# Altium PCB ES_Class6C_2L.PcbDoc
Units mm, origin at the board's own origin, x right, y up, seen from the top; angles counter-clockwise.
Board outline 100 x 100 mm, 2 copper layers (Top Layer, Bottom Layer), stack 1.586 mm thick; 72 components, 53 nets, 261 pads, 0 vias.
Unrouted connection lines stored in the file: 165.
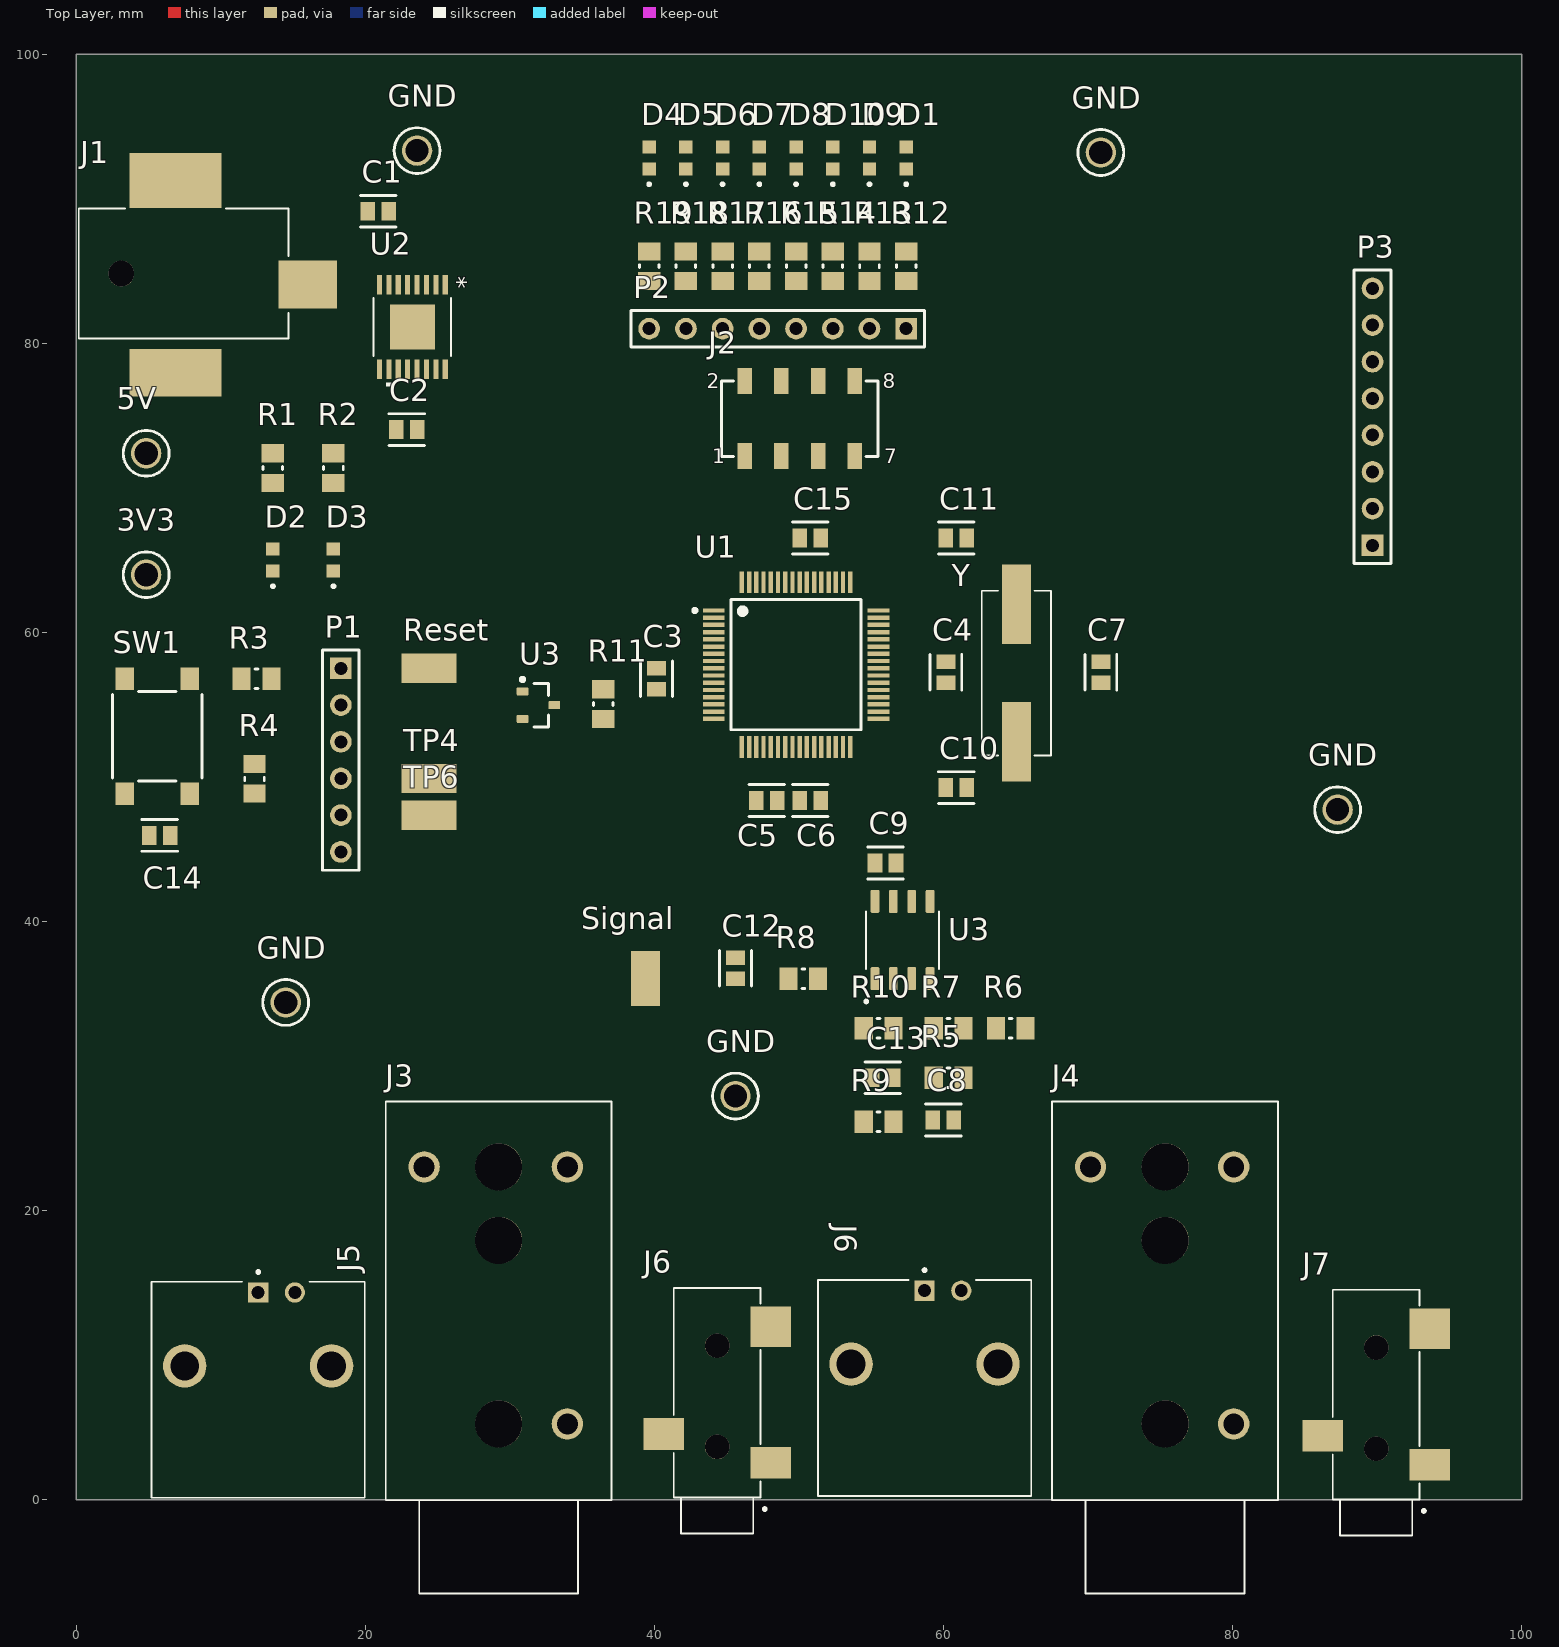
[diagram p0: Top Layer view]
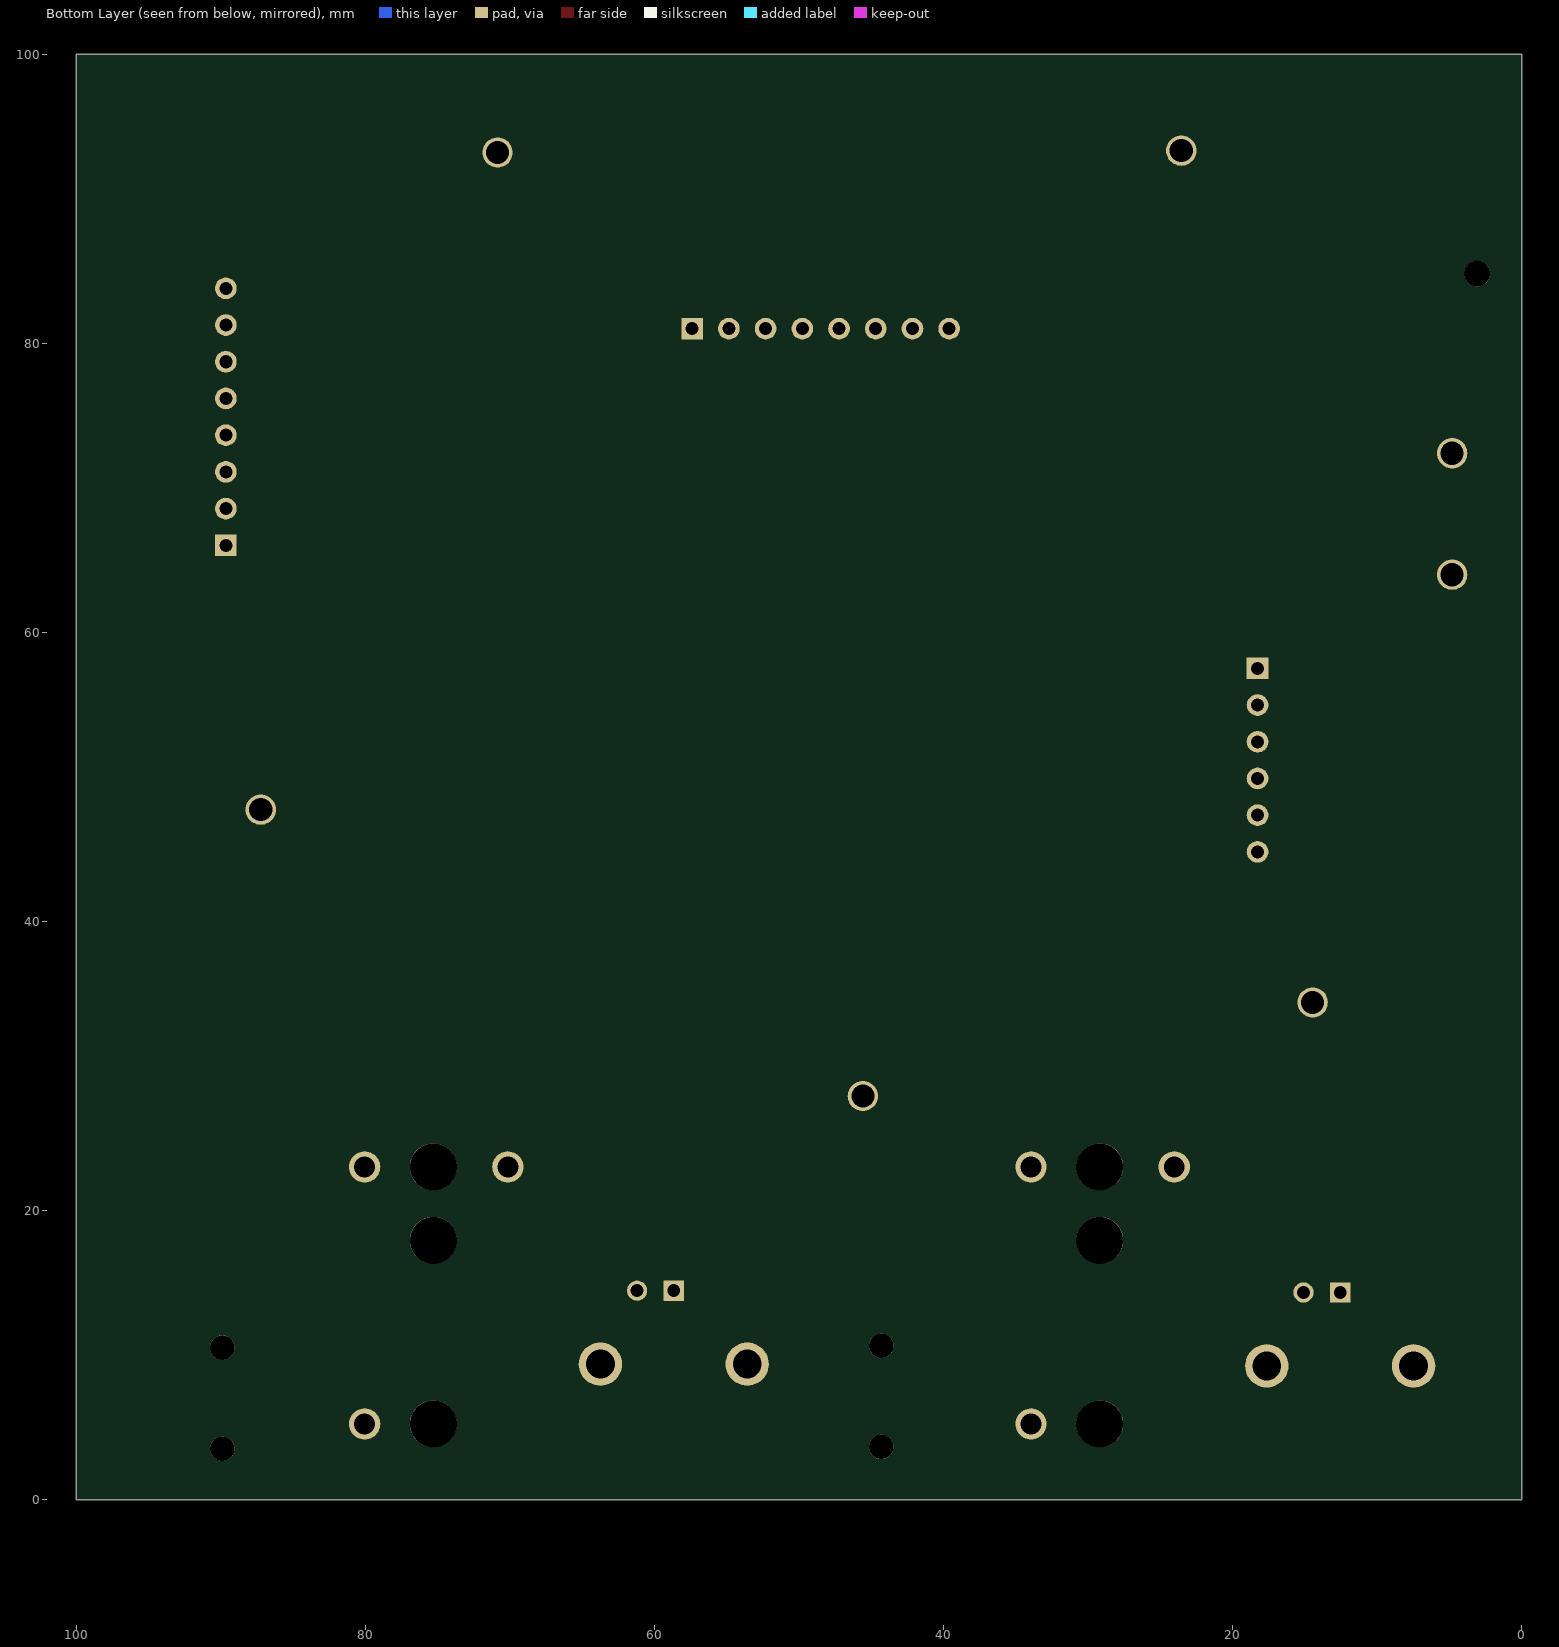
[diagram p1: Bottom Layer view, seen from below]

## Layer stack, top to bottom
Top Solder: solder mask 0.0102, Solder Resist, Dk 3.5
Top Layer: signal copper 0.018
Dielectric1: core 1.55, FR-4, Dk 4.8
Bottom Layer: signal copper 0.018
Bottom Solder: solder mask 0.0102, Solder Resist, Dk 3.5

## Board outline
0,0 100,0 100,100 0,100

## Design rules (kind name [scope] priority, off if disabled: settings)
BoardOutlineClearance [All] p1: gap=0.25 ignorepadtopadclearanceinfootprint=FALSE except(0: Arc-SplitContinuation Track-SplitContinuation SMDPad-SplitContinuation THPad-SplitContinuation Via-SplitContinuation Fill-SplitContinuation Poly-SplitContinuation Region-SplitContinuation Text-SplitContinuation)
Clearance Clearance-xPP-xTP-xTT [All] p1: gap=0.151 ignorepadtopadclearanceinfootprint=FALSE
ComponentClearance [All] p1: gap=0.25 collisioncheckmode=3 verticalgap=0.25 showdistances=FALSE
DiffPairsRouting [All] p1: maxlimit=0.25 minlimit=0.25 mostfreqgap=0.25 toplayer_minwidth=0.381 toplayer_maxwidth=0.381 toplayer_prefwidth=0.381 bottomlayer_minwidth=0.381 bottomlayer_maxwidth=0.381 bottomlayer_prefwidth=0.381 maxuncoupledlength=12.5
Height [All] p1: minheight=0 maxheight=25 prefheight=12.5
HoleSize HoleSize-PTH [All] p1: absolutevalues=TRUE maxlimit=10 minlimit=0.25 maxpercent=80.000 minpercent=20.000
HoleToHoleClearance [All] p1: gap=0.35 allowstackedmicrovias=TRUE
MinimumAnnularRing "Minimum IAR  >0.45mm" [((ObjectKind = 'Pad') OR (ObjectKind = 'Via')) And (Layer = 'MultiLayer') And (HoleDiameter > AsMM(0.45))] p1: minimumring=0.175 // minimum inner annular ring for pads > 0.45mm finished hole size
MinimumAnnularRing "Minimum IAR <=0.45mm" [((ObjectKind = 'Pad') OR (ObjectKind = 'Via')) And (Layer = 'MultiLayer') And (HoleDiameter <= AsMM(0.45))] p2: minimumring=0.175 // minimum inner annular ring for pads <= 0.45mm finished hole size
MinimumSolderMaskSliver [All] p1: minsoldermaskwidth=0.08
PasteMaskExpansion [All] p1: expansion=-0.025
PlaneClearance PlaneClearance-IPI [All] p1: clearance=0.25
PlaneConnect [All] p1: planeconnectstyle=Relief reliefexpansion=0.175 reliefentries=4 reliefconductorwidth=0.2 reliefairgap=0.2
PolygonConnect PolygonConnect-xTW [All] p1: connectstyle=Relief reliefconductorwidth=0.2 reliefentries=4 polygonreliefangle="90 Angle" airgapwidth=0.2
RoutingCorners [All] p1: cornerstyle=45-Degree minsetback=2.5 maxsetback=2.5
RoutingVias RoutingViasES [All] p1: holewidth=0.3 width=0.65 viastyle="Through Hole" minholewidth=0.25 minwidth=0.61 maxholewidth=0.45 maxwidth=0.8 // finishet hole size <= 0.45mm
SilkToSilkClearance [All] p1: silktosilkclearance=0.2
SilkToSolderMaskClearance SilkscreenOverComponentPads [IsPad] p1: minsilkscreentomaskgap=0.2 clearancetoexposedcopper=TRUE
SolderMaskExpansion [All] p1: expansion=0 istentingtop=FALSE
UnRoutedNet [All] p1: checkbadconnections=TRUE
Width Width-xTW [All] p1: maxlimit=1.5 minlimit=0.15 preferedwidth=0.2
17 further rules are at their usual default settings.

## Classes and differential pairs
component class 2225_VumetreFrequencemetre: 3V3 5V C1 C2 C3 C4 C5 C6 C7 C8 C9 C10 C11 C12 C13 C14 C15 D1 D2 D3 D4 D5 D6 D7 D8 D9 D10 GND J1 J2 J3 J4 J5 J6 J7 P1 P2 P3 R1 R2 R3 R4 R5 R6 R7 R8 R9 R10 R11 R12 R13 R14 R15 R16 R17 R18 R19 Reset Signal SW1 TP4 TP6 U1 U2 U3 Y

## Components (designator, comment, footprint, x,y, rotation, side; value= is the part's Value field where it differs from the comment)
3V3 "5010" KSTN-5010_V 4.826,64.008 r0 top
5V "5010" KSTN-5010_V 4.826,72.408 r0 top
C1 "10u" FP-GRM21B-0_15-IPC_C 20.89,89.154 r180 top
C2 "10u" FP-GRM21B-0_15-IPC_C 22.84,74.041 r180 top
C3 "100n" FP-GRM21B-0_15-IPC_C 40.132,56.811 r90 top
C4 "100n" FP-GRM21B-0_15-IPC_C 60.143,57.261 r90 top
C5 "100n" FP-GRM21B-0_15-IPC_C 47.76,48.387 r0 top
C6 "100n" FP-GRM21B-0_15-IPC_C 50.76,48.387 r180 top
C7 "100n" FP-GRM21B-0_15-IPC_C 70.866,57.261 r90 top
C8 "100n" FP-GRM21B-0_15-IPC_C 59.98,26.289 r180 top
C9 "100n" FP-GRM21B-0_15-IPC_C 55.971,44.069 r0 top
C10 "22p" FP-GRM21B-0_15-IPC_C 60.869,49.276 r180 top
C11 "22p" FP-GRM21B-0_15-IPC_C 60.869,66.548 r180 top
C12 "10n" FP-GRM21B-0_15-IPC_C 45.593,36.791 r90 top
C13 "220n" FP-GRM21B-0_15-IPC_C 55.789,29.21 r180 top
C14 "10n" FP-GRM21B-0_15-IPC_C 5.751,45.974 r180 top
C15 "10u" FP-GRM21B-0_15-IPC_C 50.764,66.548 r0 top
D1 "LTST-C191KFKT" LEDC1608X55N 57.404,92.835 r90 top
D2 "LTST-C191KFKT" LEDC1608X55N 13.589,65.026 r90 top
D3 "LTST-C191KFKT" LEDC1608X55N 17.78,65.026 r90 top
D4 "LTST-C191KFKT" LEDC1608X55N 39.624,92.835 r90 top
D5 "LTST-C191KFKT" LEDC1608X55N 42.164,92.835 r90 top
D6 "LTST-C191KFKT" LEDC1608X55N 44.704,92.835 r90 top
D7 "LTST-C191KFKT" LEDC1608X55N 47.244,92.835 r90 top
D8 "LTST-C191KFKT" LEDC1608X55N 49.784,92.835 r90 top
D9 "LTST-C191KFKT" LEDC1608X55N 54.864,92.835 r90 top
D10 "LTST-C191KFKT" LEDC1608X55N 52.324,92.835 r90 top
GND "5011" KSTN-5011_V 14.478,34.417 r0 top
GND "5011" KSTN-5011_V 87.249,47.752 r0 top
GND "5011" KSTN-5011_V 70.866,93.218 r0 top
GND "5011" KSTN-5011_V 23.566,93.345 r0 top
GND "5011" KSTN-5011_V 45.593,27.94 r0 top
J1 "RASM722PTR13X" SWITCHCRAFT_RASM722PTR13X 6.862,84.838 r270 top
J2 "61030821821" 61030821821 50.034,74.803 r0 top
J3 "SN37A12A" SWITCHCRAFT_SN37A12A 29.21,10.541 r270 top
J4 "SN37A12A" SWITCHCRAFT_SN37A12A 75.311,10.541 r270 top
J5 "CONBNC002" LINX_CONBNC002 12.573,9.271 r0 top
J6 "SJ-3523-SMT" CUI_SJ-3523-SMT 44.323,3.668 r90 top
J6 "CONBNC002" LINX_CONBNC002 58.674,9.398 r0 top
J7 "SJ-3523-SMT" CUI_SJ-3523-SMT 89.916,3.541 r90 top
P1 "Header 6" HDR1X6 18.288,57.531 r270 top
P2 "Header 8" HDR1X8 57.404,81.026 r180 top
P3 "Header 8" HDR1X8 89.662,66.04 r90 top
R1 "300" RESC2013X50X30ML20T20 13.589,71.383 r270 top
R2 "100" RESC2013X50X30ML20T20 17.78,71.383 r270 top
R3 "10k" RESC2013X50X30ML20T20 12.455,56.807 r180 top
R4 "1k" RESC2013X50X30ML20T20 12.319,49.882 r90 top
R5 "100k" RESC2013X50X30ML20T20 60.334,29.21 r0 top
R6 "100k" RESC2013X50X30ML20T20 64.634,32.639 r180 top
R7 "33k" RESC2013X50X30ML20T20 60.334,32.639 r180 top
R8 "750" RESC2013X50X30ML20T20 50.283,36.065 r180 top
R9 "200k" RESC2013X50X30ML20T20 55.49,26.162 r0 top
R10 "33k" RESC2013X50X30ML20T20 55.49,32.639 r180 top
R11 "10k" RESC2013X50X30ML20T20 36.449,55.06 r270 top
R12 "100" RESC2013X50X30ML20T20 57.404,85.353 r270 top
R13 "100" RESC2013X50X30ML20T20 54.864,85.353 r270 top
R14 "100" RESC2013X50X30ML20T20 52.324,85.353 r270 top
R15 "100" RESC2013X50X30ML20T20 49.784,85.353 r270 top
R16 "100" RESC2013X50X30ML20T20 47.244,85.353 r270 top
R17 "100" RESC2013X50X30ML20T20 44.704,85.353 r270 top
R18 "100" RESC2013X50X30ML20T20 42.164,85.353 r270 top
R19 "100" RESC2013X50X30ML20T20 39.624,85.353 r270 top
Reset "5019" KSTN-5019_V 24.384,57.531 r180 top
Signal "5019" KSTN-5019_V 39.37,36.065 r90 top
SW1 "430182043816" WS-TASV_L6W6H4.3_4301x20438x6 5.588,52.832 r270 top
TP4 "5019" KSTN-5019_V 24.384,49.911 r180 top
TP6 "5019" KSTN-5019_V 24.384,47.371 r180 top
U1 "IC_Microchip_PIC32MX470F512H-120-PT_eec" Microchip_C04-085B_0 49.784,57.785 r0 top
U2 "MAX1793EUE33+" 21-0108_U16E+3_MXM 23.241,81.153 r270 top
U3 "TL431IDBZR" DBZ0003A_L 31.961,54.985 r0 top
U3 "MCP6002-E/SN" SOIC127P599X175-8N 57.15,38.735 r90 top
Y "ECS-100-18-5PX-TR" XTAL_ECS-100-18-5PX-TR 65.024,57.201 r90 top

## Footprints (in the part's own frame and the unit in brackets; to place one, negate y for a bottom-side part, rotate by r counter-clockwise, add the part's x,y. Pads: shape width x height; smd on the part's side, far side on the other; paste and mask are expansions set on the pad)
21-0108_U16E+3_MXM [mm]
  rect 1.353x0.355 smd paste+0 mask+0: 1(-2.925,2.275) 2(-2.925,1.625) 3(-2.925,0.975) 4(-2.925,0.325) 5(-2.925,-0.325) 6(-2.925,-0.975) 7(-2.925,-1.625) 8(-2.925,-2.275) 9(2.925,-2.275) 10(2.925,-1.625) 11(2.925,-0.975) 12(2.925,-0.325) 13(2.925,0.325) 14(2.925,0.975) 15(2.925,1.625) 16(2.925,2.275)
  rect 3.099x3.099 smd paste-1.537 mask+0: EPAD(0,0)
  silkscreen extent -2,-2.68 4.11,2.68, body extent -3.25,-2.55 3.25,2.55, height 1.09
61030821821 [mm] "Socket Header, Pitch 2.54 mm, SMT, Vertical, dual row, 8p"
  rect 1x1.8 smd: 1(-3.81,-2.6) 2(-3.81,2.6) 3(-1.27,-2.6) 4(-1.27,2.6) 5(1.27,-2.6) 6(1.27,2.6) 7(3.81,-2.6) 8(3.81,2.6)
  silkscreen extent -5.41,-2.62 5.41,2.62, body extent -5.08,-3.35 5.08,3.35, height 8.52
CUI_SJ-3523-SMT [mm]
  rect 2.2x2.8 smd: 1(-1.1,-3.7) 3(0.9,3.7)
  rect 2.8x2.8 smd: 2(8.3,-3.7)
  round 1.7 hole 1.7 unplated: ""(0,0) ""(7,0)
  silkscreen extent -6,-3.4 11,3
DBZ0003A_L [mm] "SOT23, 3-Leads, Body 3.04x1.4mm, Pitch 0.95mm, IPC High Density"
  rrect18% 0.8x0.55 smd: 1(-1.1,0.95) 2(-1.1,-0.95) 3(1.1,0)
  silkscreen extent -1.22,-1.5 0.7,1.9, body extent -1.26,-1.46 1.26,1.46, height 0.96
FP-GRM21B-0_15-IPC_C [mm]
  rect 1.006x1.308 smd paste+0 mask+0: 1(-0.726,0) 2(0.726,0)
  silkscreen extent -1.23,-1.1 1.23,1.1, body extent -1.33,-0.8 1.33,0.8, height 0.25
HDR1X6 [mm] "Connector; Header; 6 Position"
  rect 1.5x1.5 hole 0.9: 1(0,0)
  round 1.5 hole 0.9: 2(2.54,0) 3(5.08,0) 4(7.62,0) 5(10.16,0) 6(12.7,0)
  silkscreen extent -1.27,-1.27 13.97,1.27
HDR1X8 [mm] "Connector; Header; 8 Position"
  rect 1.5x1.5 hole 0.9: 1(0,0)
  round 1.5 hole 0.9: 2(2.54,0) 3(5.08,0) 4(7.62,0) 5(10.16,0) 6(12.7,0) 7(15.24,0) 8(17.78,0)
  silkscreen extent -1.27,-1.27 19.05,1.27
KSTN-5010_V [mm] "Test Point, Dia 3.17mm"
  round 2.1 hole 1.6: 1(0,0)
  silkscreen extent -1.59,-1.58 1.59,1.58, body extent -1.59,-1.59 1.59,1.59, height 8.13
KSTN-5011_V [mm] "Test Point, Dia 3.17mm"
  round 2.1 hole 1.6: 1(0,0)
  silkscreen extent -1.59,-1.58 1.59,1.58, body extent -1.59,-1.59 1.59,1.59, height 8.13
KSTN-5019_V [mm] "Test Point, 1-Leads, Body 3.81x2.03mm"
  rect 3.8x2.03 smd: 1(0,0)
  body extent -1.9,-1.01 1.9,1.02, height 2.29
LEDC1608X55N [mm]
  rect 0.91x0.93 smd: A(0.76,0) C(-0.76,0)
  silkscreen extent -1.91,-0.1 -1.72,0.1, body extent -0.4,-0.8 0.4,0.8, height 0.8
LINX_CONBNC002 [mm]
  rect 1.398x1.398 / inner round 1.398 / far side rect 1.398x1.398 hole 0.89: 1(0,5.08)
  round 1.398 hole 0.89: 2(2.54,5.08)
  round 3 hole 2: S1(-5.08,0) S2(5.08,0)
  silkscreen extent -7.37,-9.12 7.37,6.6, body extent -7.95,-29.38 7.95,5.82, height 14.89
Microchip_C04-085B_0 [mm]
  rect 1.5x0.3 smd paste+0 mask+0: 1(-5.7,3.75) 2(-5.7,3.25) 3(-5.7,2.75) 4(-5.7,2.25) 5(-5.7,1.75) 6(-5.7,1.25) 7(-5.7,0.75) 8(-5.7,0.25) 9(-5.7,-0.25) 10(-5.7,-0.75) 11(-5.7,-1.25) 12(-5.7,-1.75) 13(-5.7,-2.25) 14(-5.7,-2.75) 15(-5.7,-3.25) 16(-5.7,-3.75) 33(5.7,-3.75) 34(5.7,-3.25) 35(5.7,-2.75) 36(5.7,-2.25) 37(5.7,-1.75) 38(5.7,-1.25) 39(5.7,-0.75) 40(5.7,-0.25) 41(5.7,0.25) 42(5.7,0.75) 43(5.7,1.25) 44(5.7,1.75) 45(5.7,2.25) 46(5.7,2.75) 47(5.7,3.25) 48(5.7,3.75)
  rect 0.3x1.5 smd paste+0 mask+0: 17(-3.75,-5.7) 18(-3.25,-5.7) 19(-2.75,-5.7) 20(-2.25,-5.7) 21(-1.75,-5.7) 22(-1.25,-5.7) 23(-0.75,-5.7) 24(-0.25,-5.7) 25(0.25,-5.7) 26(0.75,-5.7) 27(1.25,-5.7) 28(1.75,-5.7) 29(2.25,-5.7) 30(2.75,-5.7) 31(3.25,-5.7) 32(3.75,-5.7) 49(3.75,5.7) 50(3.25,5.7) 51(2.75,5.7) 52(2.25,5.7) 53(1.75,5.7) 54(1.25,5.7) 55(0.75,5.7) 56(0.25,5.7) 57(-0.25,5.7) 58(-0.75,5.7) 59(-1.25,5.7) 60(-1.75,5.7) 61(-2.25,5.7) 62(-2.75,5.7) 63(-3.25,5.7) 64(-3.75,5.7)
  silkscreen extent -7.12,-4.5 4.5,4.5, body extent -6.55,-6.55 6.55,6.55, height 0.25
RESC2013X50X30ML20T20 [mm] "Chip Resistor, 2-Leads, Body 2.00x1.25mm, IPC Low Density"
  rect 1.25x1.55 smd: 1(-1.025,0) 2(1.025,0)
  silkscreen extent -0.1,-0.67 0.1,0.67, body extent -1.1,-0.72 1.1,0.72, height 0.5
SOIC127P599X175-8N [mm]
  rrect25% 1.58x0.6 smd: 1(-2.67,1.905) 2(-2.67,0.635) 3(-2.67,-0.635) 4(-2.67,-1.905) 5(2.67,-1.905) 6(2.67,-0.635) 7(2.67,0.635) 8(2.67,1.905)
  silkscreen extent -4.35,-2.52 1.99,2.6
SWITCHCRAFT_RASM722PTR13X [mm]
  rect 3.3x4.06 smd: 1(0.76,9.14)
  rect 3.81x6.35 smd: 2(-6.43,0)
  rect 3.3x6.35 smd: 3(6.86,0)
  round 1.78 hole 1.78 unplated mask+0.254: ""(0,-3.76)
  silkscreen extent -4.5,-6.7 4.5,7.8, body extent -7.47,-6.6 7.77,10.41, height 11.02
SWITCHCRAFT_SN37A12A [mil]
  round 85.5 hole 57: S(208,187) T(-492,187) TB(-492,-203)
  round 128 hole 128 unplated: ""(-492,0) ""(-292,0) ""(208,0)
  silkscreen extent -670,-308 670,308
WS-TASV_L6W6H4.3_4301x20438x6 [mm] "SMD Tact Switch, body 6x6mm"
  rect 1.55x1.3 smd: A1(-3.975,2.25) A2(3.975,2.25) B1(-3.975,-2.25) B2(3.975,-2.25)
  silkscreen extent -3.1,-3.1 3.1,3.1, body extent -4.5,-3.1 4.5,3.1, height 4.3
XTAL_ECS-100-18-5PX-TR [mm]
  rect 5.5x2 smd: 1(-4.75,0) 2(4.75,0)
  silkscreen extent -5.7,-2.4 5.7,2.4

## Part data
3V3 5V: library part CMP-1672-00002-4, "Test Point, Red, Through Hole, RoHS, Bulk", Colour=Red, Manufacturer=Keystone, Package Quantity=100, ComponentLink1Description="Manufacturer URL", ComponentLink1URL=http://www.keyelco.com/, ComponentLink2Description=Datasheet, ComponentLink2URL=http://www.keyelco.com/product-pdf.cfm?p=1319, Contact Material=Bronze, Contact Plating=Silver, DatasheetVersion="Rev. F, 12/2013", Height="8.12 mm", Mount="Through Hole", Mounting Technology="Through Hole", PackageDescription="1-Pin Through Hole Device, Dia 3.17 mm", PackageReference=5010, Packaging=Bulk, Pins=1, REACH SVHC="No SVHC", RoHSCompliant=true
C1 C2 C3 C4 C5 C6 C7 C8 C9 C10 C11 C12 C13 C14 C15: library part CMP-2007-03541-2, "Chip Multilayer Ceramic Capacitors for General Purpose, 0805, 10uF, X5R, 15%, 10%, 25V", Capacitance=10uF, Case Code (Imperial)=0805, Case Code (Metric)=2012, Dielectric=X5R, Max Operating Temperature=85°C, Min Operating Temperature=-55°C, Package Quantity=1, Tolerance=10%, Voltage=25V, Case/Package=0805, Depth=1.25mm, Height=1.25mm, Lead Free="Lead Free", Length=2mm, Material=Ceramic, Mount="Surface Mount", Packaging="Tape and Reel", Radiation Hardening=No, Termination=SMD/SMT, Thickness=0.053inch, Voltage Rating=25V, Voltage Rating (DC)=25V, Width=0.049inch
D1 D2 D3 D4 D5 D6 D7 D8 D9 D10: "Orange 605nm LED Indication - Discrete 2V 0603 (1608 Metric)", Package="0603 Lite-On", Availability="In Stock", Check_prices=https://www.snapeda.com/parts/LTST-C191KFKT/Lite-On+Inc./view-part/?ref=eda, MF="Lite-On Inc.", MP=LTST-C191KFKT, Price=None, Purchase-URL=https://pricing.snapeda.com/search/part/LTST-C191KFKT/?ref=eda, SnapEDA_Link=https://www.snapeda.com/parts/LTST-C191KFKT/Lite-On+Inc./view-part/?ref=snap
GND GND GND GND GND: library part CMP-1672-00003-4, "Test Point, Black, Through Hole, RoHS, Bulk", Colour=Black, Manufacturer=Keystone, Package Quantity=100, ComponentLink1Description="Manufacturer URL", ComponentLink1URL=http://www.keyelco.com/, ComponentLink2Description=Datasheet, ComponentLink2URL=http://www.keyelco.com/product-pdf.cfm?p=1320, Contact Material=Bronze, Contact Plating=Silver, DatasheetVersion="Rev. F, 12/2013", Height="8.12 mm", Mount="Through Hole", Mounting Technology="Through Hole", PackageDescription="1-Pin Through Hole Device, Dia 3.17 mm", PackageReference=5011, Packaging=Bulk, Pins=1, REACH SVHC="No SVHC", RoHSCompliant=true
J1: "Power Barrel Connector Jack 2.10mm ID (0.083), 5.50mm OD (0.217) Surface Mount, Right Angle", Package=None, Supplier Part Number 1=SC2028-1-ND, Availability="In Stock", Check_prices=https://www.snapeda.com/parts/RASM722PTR13X/Switchcraft+%252F+Conxall/view-part/?ref=eda, MF=Switchcraft, MP=RASM722PTR13X, Price=None, Purchase-URL=https://pricing.snapeda.com/search/part/RASM722PTR13X/?ref=eda, SnapEDA_Link=https://www.snapeda.com/parts/RASM722PTR13X/Switchcraft+%252F+Conxall/view-part/?ref=snap, Supplier 1=Digi-Key
J2: "WR-PHD Socket Header, SMT, Vertical, pitch 2.54mm, 2 Row, 8P", Contact Resistance=20mΩ, Manufacturer="Wurth Elektronik", Operating Temperature Max=105°C, Operating Temperature Min=-40°C, Rated Current=3A, Supplier Part Number 1=732-13381-1-ND, Withstanding Voltage=600V, Working Voltage=250V, Category="Board-to-Board Connectors", ComponentLink1Description="Website Link", ComponentLink1URL=https://www.we-online.com/redexpert/article/61030821821?ad, ComponentLink2Description="Datasheet Link", ComponentLink2URL=https://www.we-online.com/redexpert/spec/61030821821?ad, Gender="Socket Header", Manufacturer Part Number=61030821821, Match Code=WR-PHD, Mount="Surface Mount", Number of Pins=8, Number of Rows=2, Orientation=Vertical, Packaging="Tape and Reel", Pitch=2.54mm, Supplier 1=Digi-Key
J3 J4: Package=None, Supplier Part Number 1=SC2014-ND, Availability=Unavailable, MP=SN37A12A, Price=None, Supplier 1=Digi-Key
J5 J6: "BNC Connector Jack, Female Socket 50Ohm Panel Mount, Through Hole, Right Angle Solder", Package=None, Supplier Part Number 1=343-CONBNC002-ND, Availability="In Stock", Check_prices=https://www.snapeda.com/parts/CONBNC002/Linx/view-part/?ref=eda, MF="Linx Technologies Inc.", MP=CONBNC002, Price=None, Purchase-URL=https://pricing.snapeda.com/search/part/CONBNC002/?ref=eda, SnapEDA_Link=https://www.snapeda.com/parts/CONBNC002/Linx/view-part/?ref=snap, Supplier 1=Digi-Key
J6 J7: "3.50mm _0.141, 1/8, Mini Plug_ - Headphone Phone Jack Stereo _3 Conductor, TRS_ Connector Solder", Package=None, Supplier Part Number 1=CP-3523SJCT-ND, Availability=Unavailable, MF="CUI Devices", MP=SJ-3523-SMT, Price=None, SnapEDA_Link=https://www.snapeda.com/parts/SJ-3523-SMT/CUI%20Devices/view-part/278287/?ref=snap, Supplier 1=Digi-Key
P1: "Header, 6-Pin", LatestRevisionDate=17-Jul-2002, LatestRevisionNote="Re-released for DXP Platform.", Publisher="Altium Limited"
P2 P3: "Header, 8-Pin", LatestRevisionDate=17-Jul-2002, LatestRevisionNote="Re-released for DXP Platform.", Publisher="Altium Limited"
R1 R2 R3 R4 R5 R6 R7 R8 R9 R10 R11 R12 R13 R14 R15 R16 R17 R18 R19: library part CMP-2001-04896-1, Manufacturer="Vishay Dale", Part Number=CRCW08050000Z0EA
Reset Signal TP4 TP6: library part CMP-1672-00008-1, "Test Point, 1 Position SMD, RoHS, Tape and Reel", Package Quantity=1000, ComponentLink1Description="Manufacturer URL", ComponentLink1URL=http://www.keyelco.com/, ComponentLink2Description=Datasheet, ComponentLink2URL=http://www.keyelco.com/product-pdf.cfm?p=1357, Contact Plating=Silver, DatasheetVersion=03/2014, Mount="Surface Mount", Mounting Technology="Surface Mount", PackageDescription="1-Pin Surface Mount Device, Body 3.81 x 2.03 mm", PackageReference=5019, Packaging="Tape and Reel", Pins=1, RoHSCompliant=True
SW1: "WS-TASV SMT Tact Switch, L6 x W6 x H4.3mm, 160g, SPST-NO, 12V, 50mA", Manufacturer="Wurth Elektronik", Operating Temperature Max=85°C, Operating Temperature Min=-40°C, Rated Current=50mA, Rated Voltage (DC)=12V, Supplier Part Number 1=732-7004-1-ND, Category="Tact Switches", Circuit=SPST-NO, ComponentLink1Description="Website Link", ComponentLink1URL=https://www.we-online.com/redexpert/article/430182043816?ad, ComponentLink2Description="Datasheet Link", ComponentLink2URL=https://www.we-online.com/redexpert/spec/430182043816?ad, Contact Material="Stainless Steel", Contact Plating=Silver, Height=4.3mm, Length=6mm, Manufacturer Part Number=430182043816, Match Code=WS-TASV, Mount="Surface Mount", Operation Force=160g, Packaging="Tape and Reel", Supplier 1=Digi-Key, Terminal Material="Copper Alloy", Terminal Plating=Silver, Washable=No, Width=6mm
U1: "IC MCU 32BIT 512KB FLASH 64TQFP", Digikey Part Number=PIC32MX470F512H-120/PT-ND, Manufacturer=Microchip, Mfg Package Ident=C04-085B, Mouser Part Number=579-MX470F512H120PT, Part Number=PIC32MX470F512H-120/PT, Temperature="0°C to +70°C", Temperature Range High=+70°C, Temperature Range Low=0°C, ComponentLink1Description=Upverter, ComponentLink1URL=https://upverter.com/upn/revision/9274a2e649b597c2/, ComponentLink2Description=Datasheet, ComponentLink2URL=http://ww1.microchip.com/downloads/en/DeviceDoc/60001185D.pdf, Digikey Description="IC MCU 32BIT 512KB FLASH 64TQFP", helpURL=https://upverter.com/upn/revision/9274a2e649b597c2/, Lead Free=yes, Package=C04-085B, Price=5.64420643681, RoHS=TRUE, Supplier 1=Digi-Key, Supplier 2=Mouser, Supplier Part Number 1=PIC32MX470F512H-120/PT-ND, Supplier Part Number 2=579-MX470F512H120PT
U2: "No Description Available", Mfr_Name="Analog Devices Inc", Copyright="Copyright (C) 2023 Ultra Librarian. All rights reserved.", Digi-Key_Part_Number_1=MAX1793EUE33+-ND, Manufacturer_Part_Number=MAX1793EUE33+, RefDes=RefDes, Type=DEV
U3: library part CMP-0366-01140-2, "Adjustable Precision Shunt Regulator, 34 ppm / degC, 100 mA, -40 to 85 degC, 3-pin SOT-23 (DBZ), Green (RoHS & no Sb/Br)", Manufacturer="Texas Instruments", Rating=Military, Temp Coeff(Max)(ppm/ degree C)=92, Temp Coeff(Typ)(ppm/ degree C)=34, Code_JEDEC=TO-236, ComponentLink1Description="Manufacturer URL", ComponentLink1URL=http://www.ti.com/, ComponentLink2Description=Datasheet, ComponentLink2URL=http://www.ti.com/general/docs/lit/getliterature.tsp?genericPartNumber=TL431&fileType=pdf, ComponentLink3Description="Package Specification", ComponentLink3URL=http://www.ti.com/litv/pdf/mpds108a, DatasheetVersion=SLVS543M, Eco-Plan="Green (RoHS & no Sb/Br)", Initial Accuracy @ 25/deg C(%)=2, Iout/Iz(Max)(mA)=100, Min Iz for Regulation(uA)=600, Mounting Technology="Surface Mount", PackageDescription="3-Pin Plastic Small Outline, Body 2.92 x 1.3 mm, Pitch 0.95 mm", PackageReference=DBZ0003A, PackageVersion=4203227/B, PartNumber=TL431IDBZR, SubFamily="Shunt Voltage Reference", VO Adj(Max)(V)=36, VO Adj(Min)(V)=2.495
U3: "General Purpose Amplifier 2 Circuit Rail-to-Rail 8-SOIC", Package="SOIC-8 Microchip", Supplier Part Number 1=MCP6002-E/SN-ND, Availability=Unavailable, MF=Microchip, MP=MCP6002-E/SN, Price=None, SnapEDA_Link=https://www.snapeda.com/parts/MCP6002-E/SN/Microchip/view-part/299798/?ref=snap, Supplier 1=Digi-Key
Y: "10MHz Â±30ppm Crystal 18pF 50 Ohms HC-49/US", Package="HC49/US ECS International", Digi-Key_Part_Number=XC1288CT-ND, Digi-Key_Purchase_URL=https://www.digikey.com/product-detail/en/ecs-inc/ECS-100-18-5PX-TR/XC1288CT-ND/827752?utm_source=snapeda&utm_medium=aggregator&utm_campaign=symbol, MF="ECS Inc.", MP=ECS-100-18-5PX-TR, SnapEDA_Link=https://www.snapeda.com/parts/ECS-100-18-5PX-TR/ECS%20Inc./view-part/2455545/?ref=snap

## Nets (pads, with @x,y where several pads share a name; then routed paths per layer and width w, separated by ;. In a path a pad name is that pad's centre, name@x,y a point inside that pad or via, vN(x,y) a via of type N, cw(c..) or ccw(c..) an arc to the next point about the centre after c; other vN are vias at no path point)
/SS1: J2.5 U1.6
DOUT: J2.1 U1.4
GND: C1.2 C2.2 C3.2 C4.2 C5.2 C6.2 C7.2 C8.1 C9.2 C10.2 C11.2 C12.2 C14.2 C15.2 D2.C D3.C GND.1 J1.2 J1.3 J2.4 J2.8 P1.3 R5.2 SW1.B1 SW1.B2 U1.9 U1.20 U1.25 U1.41 U2.10 U2.11 U2.EPAD U3.3@33.061,54.985 U3.4 U3.5 U3.6
LED0: P2.1 R12.2 U1.60
LED1: P2.2 R13.2 U1.61
LED2: P2.3 R14.2 U1.62
LED3: P2.4 R15.2 U1.63
LED4: P2.5 R16.2 U1.64
LED5: P2.6 R17.2 U1.1
LED6: P2.7 R18.2 U1.2
LED7: P2.8 R19.2 U1.3
MISO: J2.2 U1.5
NetC1_1: C1.1 U2.3 U2.4 U2.5 U2.7
NetC8_2: C8.2 R5.1 R7.2 U3.3@57.785,36.065
NetC13_1: C13.1 R9.2 R10.1 U3.2@56.515,36.065
NetC13_2: C13.2 R8.1 R10.2 U3.1@55.245,36.065
NetC14_1: C14.1 R3.2 R4.1 SW1.A1 SW1.A2
NetC15_1: C15.1 U1.56
NetD1_C: D1.C R12.1
NetD2_A: D2.A R1.2
NetD3_A: D3.A R2.2
NetD4_C: D4.C R19.1
NetD5_C: D5.C R18.1
NetD6_C: D6.C R17.1
NetD7_C: D7.C R16.1
NetD8_C: D8.C R15.1
NetD9_C: D9.C R13.1
NetD10_C: D10.C R14.1
NetJ3_S: J3.S J4.S J5.1 J6.1 J7.1 R9.1
NetJ3_T: J3.T J4.T
NetJ3_TB: J3.TB J4.TB
NetJ5_2: J5.2 J5.S1 J5.S2 J6.2@61.214,14.478 J6.S1 J6.S2
NetJ6_2: J6.2@48.023,11.968 J7.2
NetJ6_3: J6.3 J7.3
NetP3_1: P3.1 U1.46
NetP3_2: P3.2 U1.52
NetP3_3: P3.3 U1.53
NetP3_4: P3.4 U1.42
NetP3_5: P3.5 U1.43
NetP3_6: P3.6 U1.44
NetP3_7: P3.7 U1.45
NetP3_8: P3.8 U1.54
NetR6_2: R6.2 R7.1
OSC1: C10.1 U1.39 Y.1
OSC2: C11.1 U1.40 Y.2
PGEC2: P1.5 TP6.1 U1.17
PGED2: P1.4 TP4.1 U1.18
Reset: P1.1 R4.2 Reset.1 U1.7
SCK1: J2.6 U1.8
Signal: C12.1 R8.2 Signal.1 U1.12
VCC3V3: 3V3.1 C2.1 C3.1 C4.1 C5.1 C6.1 C7.1 C9.1 D1.A D4.A D5.A D6.A D7.A D8.A D9.A D10.A P1.2 R2.1 R3.1 R6.1 R11.1 U1.10 U1.19 U1.26 U1.34 U1.35 U1.38 U1.57 U2.12 U2.13 U2.14 U2.15 U3.8
VCC5V: 5V.1 J1.1 J2.3 J2.7 R1.1 U2.2
VREF: R11.2 U1.16 U3.1@30.861,55.935 U3.2@30.861,54.035
pads on no net: J1. J3. J4. J6. J7. P1.6 U1.11 U1.13 U1.14 U1.15 U1.21 U1.22 U1.23 U1.24 U1.27 U1.28 U1.29 U1.30 U1.31 U1.32 U1.33 U1.36 U1.37 U1.47 U1.48 U1.49 U1.50 U1.51 U1.55 U1.58 U1.59 U2.1 U2.6 U2.8 U2.9 U2.16 U3.7

## Text inside footprints (layer, text, board x,y; h text height)
J1: Components Bodies "PCB EDGE" at 0.362,79.938 h0.81 r270
J2: Top Overlay "2" at 43.594,76.903 h1.02; Top Overlay "1" at 43.994,71.703 h1.02; Top Overlay "7" at 55.874,71.703 h1.02; Top Overlay "8" at 55.774,76.903 h1.02
J5: Components Bodies "PCB EDGE" at 21.463,1.651 h1.78
J6: Components Bodies "PCB EDGE" at 67.564,1.778 h1.78
U2: Top Overlay "*" at 25.744,84.649 h1.27 r270; Components Bodies "*" at 24.447,83.337 h1.27 r270